# Altium PCB PCB2.PcbDoc
Units mm, origin at the board's own origin, x right, y up, seen from the top; angles counter-clockwise.
Board outline 41 x 58.5 mm, 2 copper layers (Top Layer, Bottom Layer); 34 components, 24 nets, 144 pads, 0 vias.
Unrouted connection lines stored in the file: 49.
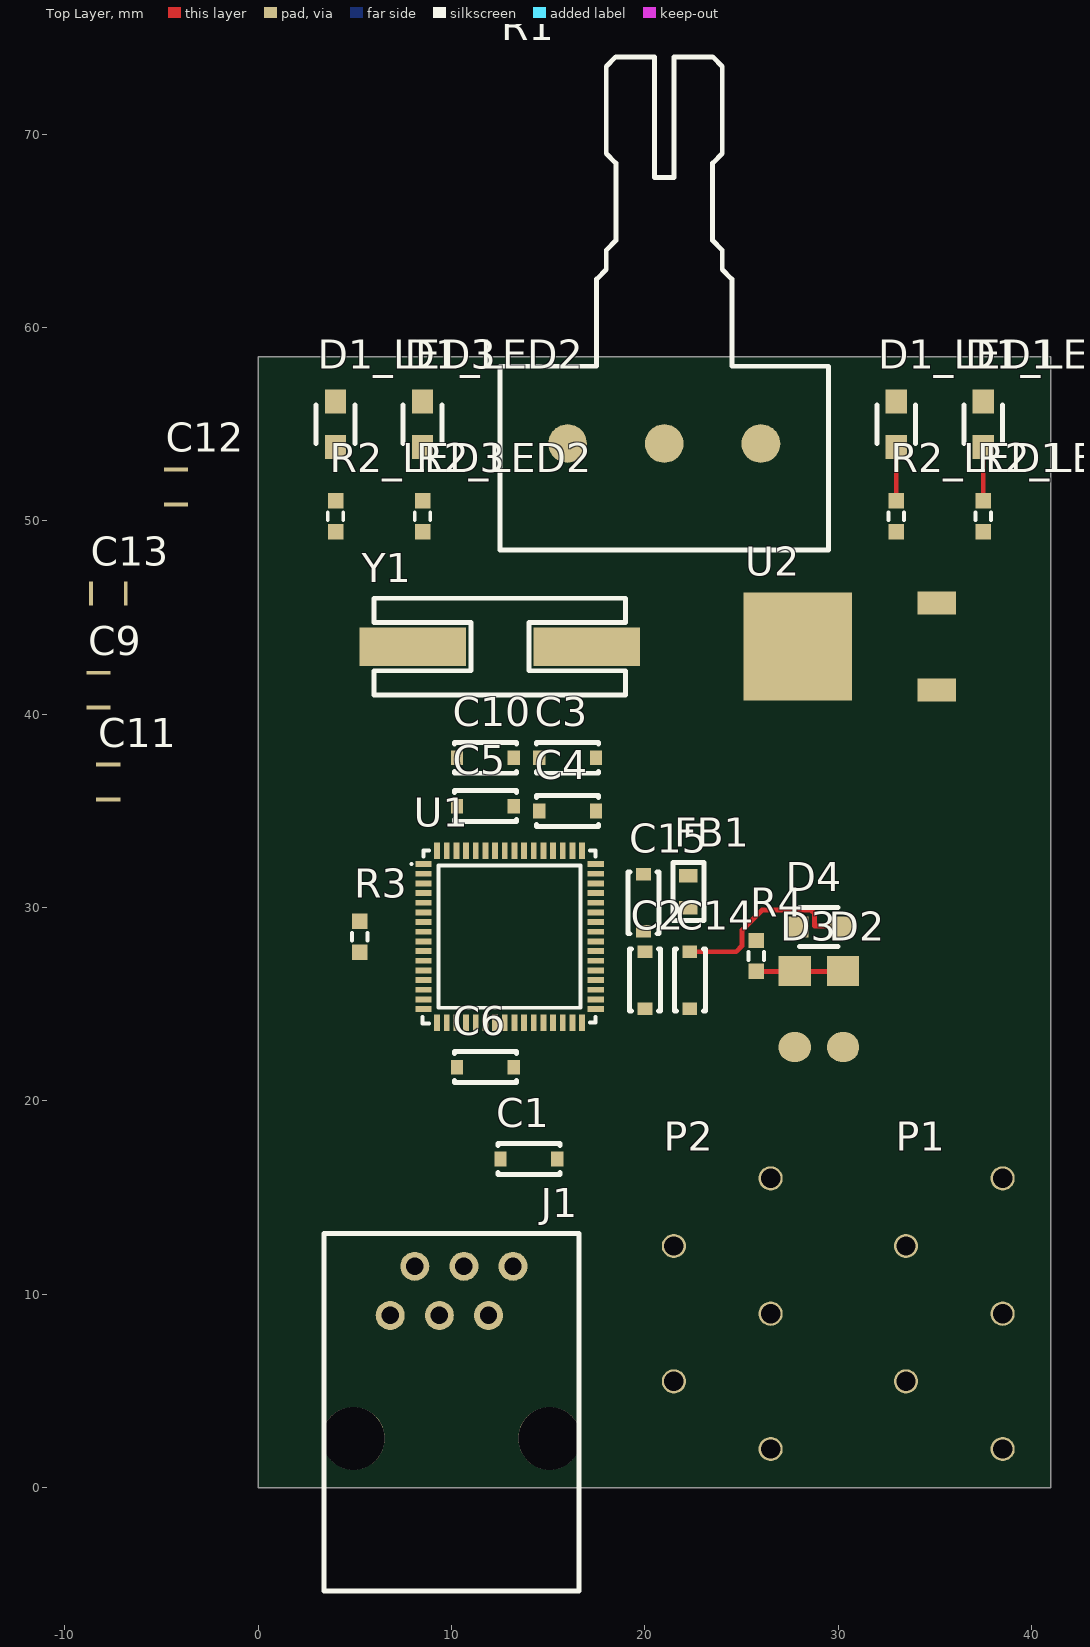
[diagram p0: Top Layer view]
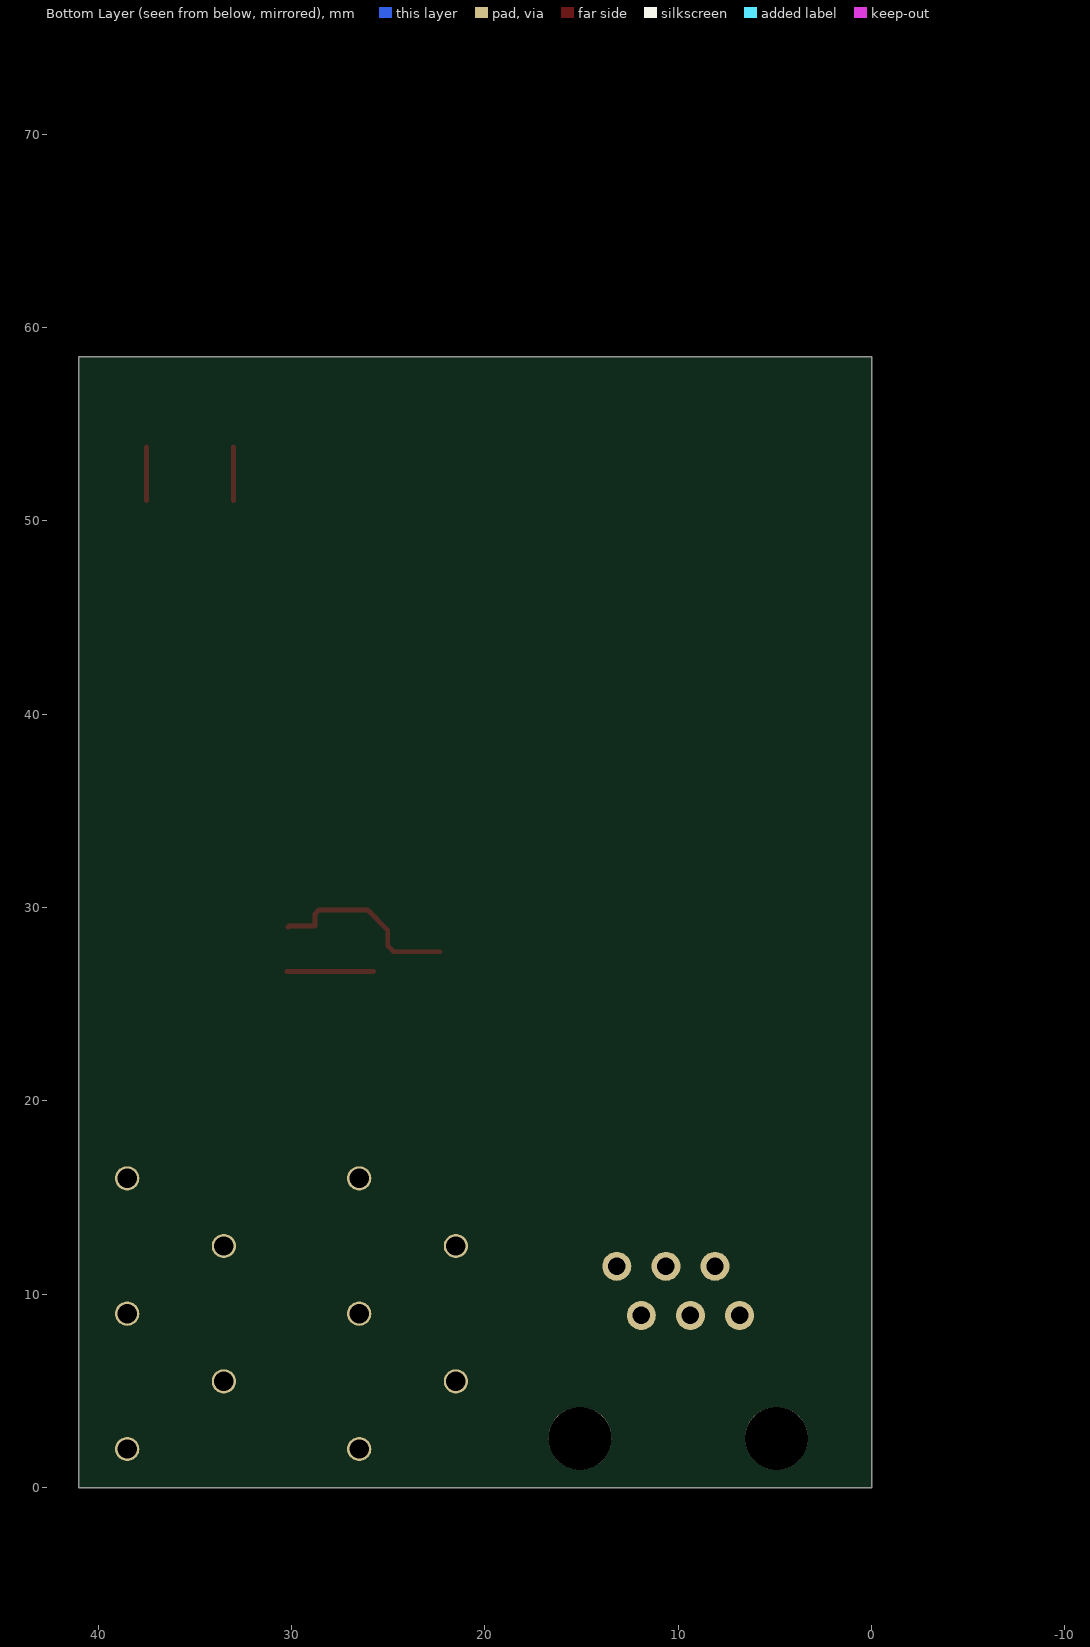
[diagram p1: Bottom Layer view, seen from below]

## Layer stack, top to bottom
Top Solder: solder mask 0.0102, Solder Resist, Dk 3.5
Top Layer: signal copper 0.0356
Dielectric 1: dielectric 0.32, FR-4, Dk 4.8
Bottom Layer: signal copper 0.0356
Bottom Solder: solder mask 0.0102, Solder Resist, Dk 3.5

## Board outline
0,0 41,0 41,58.5 0,58.5

## Design rules (kind name [scope] priority, off if disabled: settings)
Clearance [All] p1: gap=0.2
HoleSize [All] p1: absolutevalues=TRUE maxlimit=5 minlimit=0.3 maxpercent=80.000 minpercent=20.000
PolygonConnect [All] p1: connectstyle=Relief reliefconductorwidth=0.254 reliefentries=4 polygonreliefangle="90 Angle" airgapwidth=0.254
RoutingVias [All] p1: holewidth=0.3 width=0.7 viastyle="Through Hole" minholewidth=0.3 minwidth=0.7 maxholewidth=1 maxwidth=1.4
SolderMaskExpansion [All] p1: expansion=0.102
UnpouredPolygon [All] p1: allowunpoured=FALSE
Width [All] p1: maxlimit=3 minlimit=0.2 preferedwidth=0.2
28 further rules are at their usual default settings.

## Classes and differential pairs
channel class led: LED0 LED1 LED2 LED3
net class LED[0..3]: LED0 LED1 LED2 LED3
component class TP3: R1
component class POWER: C11 C12 C13 C14 C15 D2 D3 D4 FB1 P1 P2 R4 U2
component class PIC: C1 C2 C3 C4 C5 C6 C7 C8 C9 C10 J1 R3 U1 Y1
component class LED3: D1_LED3 R2_LED3
component class LED2: D1_LED2 R2_LED2
component class LED1: D1_LED1 R2_LED1
component class LED0: D1_LED0 R2_LED0

## Components (designator, comment, footprint, x,y, rotation, side; value= is the part's Value field where it differs from the comment)
C1 "100nF" CAPC1608N 14,17 r0 top
C2 "100nF" CAPC1608N 20,26.25 r270 top
C3 "100nF" CAPC1608N 16,37.75 r0 top
C4 "100nF" CAPC1608N 16,35 r0 top
C5 "100nF" CAPC1608N 11.75,35.25 r0 top
C6 "100nF" CAPC1608N 11.75,21.75 r180 top
C9 "10uF" CAPC2012N -8.25,41.25 r90 top
C10 "1uF" CAPC1608N 11.75,37.75 r0 top
C11 "10uF" CAPC2012N -7.75,36.5 r90 top
C12 "10uF" CAPC2012N -4.25,51.75 r90 top
C13 "10uF" CAPC2012N -7.75,46.25 r180 top
C14 "1uF" CAPC1608N 22.325,26.25 r270 top
C15 "100nF" CAPC1608N 19.925,30.25 r90 top
D1_LED0 "Green LED" "LED 0805" 37.5,55 r90 top (schematic designator D1)
D1_LED1 "Green LED" "LED 0805" 33,55 r90 top (schematic designator D1)
D1_LED2 "Green LED" "LED 0805" 8.5,55 r90 top (schematic designator D1)
D1_LED3 "Green LED" "LED 0805" 4,55 r90 top (schematic designator D1)
D2 "GF1A" SMA/DO-214AC 30.25,24.75 r90 top
D3 "GF1A" SMA/DO-214AC 27.75,24.75 r90 top
D4 "Green LED" "LED 0805" 29,29 r0 top
FB1 "600r" INDC1608AN 22.25,30.825 r270 top
J1 "Program / Debug" RJ12_90 10,7 r270 top
P1 "12V Main" PHOENIX_1985195 38.5,2 r90 top
P2 "12V Battery" PHOENIX_1985195 26.5,2 r90 top
R1 "" PDB181-K 21,54 r0 top
R2_LED0 "330Ω" RESC1608N 37.5,50.25 r270 top (schematic designator R2)
R2_LED1 "330Ω" RESC1608N 33,50.25 r270 top (schematic designator R2)
R2_LED2 "330Ω" RESC1608N 8.5,50.25 r270 top (schematic designator R2)
R2_LED3 "330Ω" RESC1608N 4,50.25 r270 top (schematic designator R2)
R3 "4.7kΩ" RESC1608N 5.25,28.5 r270 top
R4 "470Ω" RESC1608N 25.75,27.5 r270 top
U1 "PIC32MX764F128H-I/PT" QFP50P1200X1200X120-64 13,28.5 r0 top
U2 "" TD03B 31.5,43.5 r90 top
Y1 "" HC49SDLF 12.5,43.5 r0 top

## Footprints (in the part's own frame and the unit in brackets; to place one, negate y for a bottom-side part, rotate by r counter-clockwise, add the part's x,y. Pads: shape width x height; smd on the part's side, far side on the other; paste and mask are expansions set on the pad)
CAPC1608N [mm]
  rect 0.64x0.76 smd: 1(-1.47,0) 2(1.47,0)
  silkscreen extent -1.6,-0.8 1.6,0.8
CAPC2012N [mm]
  rect 0.2x1.25 smd: 3(-0.9,0) 4(0.9,0)
HC49SDLF [mm]
  rect 5.5x2 smd: 1(-4.5,0) 2(4.5,0)
  silkscreen extent -6.5,-2.5 6.5,2.5
INDC1608AN [mm]
  rect 0.7x0.95 smd: 1(0.825,0) 2(-0.825,0)
  silkscreen extent -1.5,-0.8 1.5,0.8
"LED 0805" [mm]
  rect 1.25x1.1 smd: 1(-1.175,0) 2(1.175,0)
  silkscreen extent -1,-1 1,1
PDB181-K [mm]
  round 2 smd: 0(0,0) 1(-5,0) 2(5,0)
  silkscreen extent -8.5,-5.5 8.5,20
PHOENIX_1985195 [mm]
  round 1.25 hole 1: 1(14,0) 2(0,0) 3(3.5,5) 4(7,0) 5(10.5,5)
QFP50P1200X1200X120-64 [mm]
  rect 0.85x0.3 smd: 1(-4.45,3.75) 2(-4.45,3.25) 3(-4.45,2.75) 4(-4.45,2.25) 5(-4.45,1.75) 6(-4.45,1.25) 7(-4.45,0.75) 8(-4.45,0.25) 9(-4.45,-0.25) 10(-4.45,-0.75) 11(-4.45,-1.25) 12(-4.45,-1.75) 13(-4.45,-2.25) 14(-4.45,-2.75) 15(-4.45,-3.25) 16(-4.45,-3.75) 33(4.45,-3.75) 34(4.45,-3.25) 35(4.45,-2.75) 36(4.45,-2.25) 37(4.45,-1.75) 38(4.45,-1.25) 39(4.45,-0.75) 40(4.45,-0.25) 41(4.45,0.25) 42(4.45,0.75) 43(4.45,1.25) 44(4.45,1.75) 45(4.45,2.25) 46(4.45,2.75) 47(4.45,3.25) 48(4.45,3.75)
  rect 0.3x0.85 smd: 17(-3.75,-4.45) 18(-3.25,-4.45) 19(-2.75,-4.45) 20(-2.25,-4.45) 21(-1.75,-4.45) 22(-1.25,-4.45) 23(-0.75,-4.45) 24(-0.25,-4.45) 25(0.25,-4.45) 26(0.75,-4.45) 27(1.25,-4.45) 28(1.75,-4.45) 29(2.25,-4.45) 30(2.75,-4.45) 31(3.25,-4.45) 32(3.75,-4.45) 49(3.75,4.45) 50(3.25,4.45) 51(2.75,4.45) 52(2.25,4.45) 53(1.75,4.45) 54(1.25,4.45) 55(0.75,4.45) 56(0.25,4.45) 57(-0.25,4.45) 58(-0.75,4.45) 59(-1.25,4.45) 60(-1.75,4.45) 61(-2.25,4.45) 62(-2.75,4.45) 63(-3.25,4.45) 64(-3.75,4.45)
  silkscreen extent -5.07,-4.5 4.45,4.45
RESC1608N [mm]
  rect 0.8x0.8 smd: 1(-0.8,0) 2(0.8,0)
  silkscreen extent -0.2,-0.4 0.2,0.4
RJ12_90 [mm]
  round 3.25 hole 3.25 unplated: 0(4.45,5.08) 0(4.45,-5.08)
  round 1.5 hole 0.9: 1(-4.45,3.18) 2(-1.91,1.91) 3(-4.45,0.64) 4(-1.91,-0.63) 5(-4.45,-1.9) 6(-1.91,-3.17)
  silkscreen extent -6.15,-6.6 12.35,6.6
SMA/DO-214AC [mm]
  oval 1.56x1.67 smd: 1(-1.965,0)
  rect 1.56x1.67 smd: 2(1.965,0)
TD03B [mm]
  rect 1.2x2 smd: 1(-2.25,-3.6) 3(2.25,-3.6)
  rect 5.6x5.6 smd: 4(0,3.6)

## Part data
C1 C2 C3 C4 C5 C6 C9 C10 C11 C12 C13 C14 C15: library part Cap, "Capacitor"
D1_LED0 D1_LED1 D1_LED2 D1_LED3 D4: library part LED0, "Typical INFRARED GaAs LED"
D2 D3: library part Diode, "Default Diode"
FB1: library part Inductor, "Inductor"
J1: library part CON6
P1 P2: library part "Header 2", "Header, 2-Pin"
R2_LED0 R2_LED1 R2_LED2 R2_LED3 R3 R4: library part Res1, "Resistor"
U1: "PIC32MX764F128H"

## Nets (pads, with @x,y where several pads share a name; then routed paths per layer and width w, separated by ;. In a path a pad name is that pad's centre, name@x,y a point inside that pad or via, vN(x,y) a via of type N, cw(c..) or ccw(c..) an arc to the next point about the centre after c; other vN are vias at no path point)
+12: 
ALIM: D2.1 P1.2
BATTERY: D3.1 P2.2
GND: C1.1 C2.1 C3.1 C4.1 C5.1 C6.1 C10.1 C14.1 C15.1 D1_LED0.2 D1_LED1.2 D1_LED2.2 D1_LED3.2 D4.2 J1.3 P1.1 P2.1 U1.9 U1.20 U1.25 U1.41 | length 10
  Top Layer w0.254: C14.1 24.72,27.72 25.023,28.023 25.023,28.835 26.065,29.877 28.585,29.877 28.777,29.685 28.777,29.043 30.132,29.043 D4.2
LED0: R2_LED0.2 U1.46
LED1: R2_LED1.2 U1.49
LED2: R2_LED2.2 U1.50
LED3: R2_LED3.2 U1.51
MCLR: J1.1 R3.1 U1.7
NetC9_2: C10.2 U1.56
NetC11_2: D2.2 D3.2 R4.2 | length 4.5
  Top Layer w0.254: R4.2 D2.2@30.235,26.7
NetD1_LED0_1: D1_LED0.1 R2_LED0.1 | length 2.8
  Top Layer w0.254: R2_LED0.1 D1_LED0.1
NetD1_LED1_1: D1_LED1.1 R2_LED1.1 | length 2.8
  Top Layer w0.254: R2_LED1.1 D1_LED1.1
NetD1_LED2_1: D1_LED2.1 R2_LED2.1
NetD1_LED3_1: D1_LED3.1 R2_LED3.1
NetD4_1: D4.1 R4.1
NetR1_2: U1.14
PGC: J1.5 U1.15
PGD: J1.4 U1.16
V3P3: C1.2 C2.2 C3.2 C4.2 C5.2 C14.2 FB1.1 J1.2 R3.2 U1.10 U1.26 U1.35 U1.38 U1.57
V3P3A: C6.2 C15.2 FB1.2 U1.19
V5: 
X1: U1.39
X2: U1.40
pads on no net: C9.3 C9.4 C11.3 C11.4 C12.3 C12.4 C13.3 C13.4 J1.0 J1.6 P1.3 P1.4 P1.5 P2.3 P2.4 P2.5 R1.0 R1.1 R1.2 U1.1 U1.2 U1.3 U1.4 U1.5 U1.6 U1.8 U1.11 U1.12 U1.13 U1.17 U1.18 U1.21 U1.22 U1.23 U1.24 U1.27 U1.28 U1.29 U1.30 U1.31 U1.32 U1.33 U1.34 U1.36 U1.37 U1.42 U1.43 U1.44 U1.45 U1.47 U1.48 U1.52 U1.53 U1.54 U1.55 U1.58 U1.59 U1.60 U1.61 U1.62 U1.63 U1.64 U2.1 U2.3 U2.4 Y1.1 Y1.2

## Silkscreen, mask and mechanical layers (free items; w line width, h text height)
Board Outline:
  the board outline again, w0.254